# EAGLE board quadcopter (EAGLE 8.1.1)
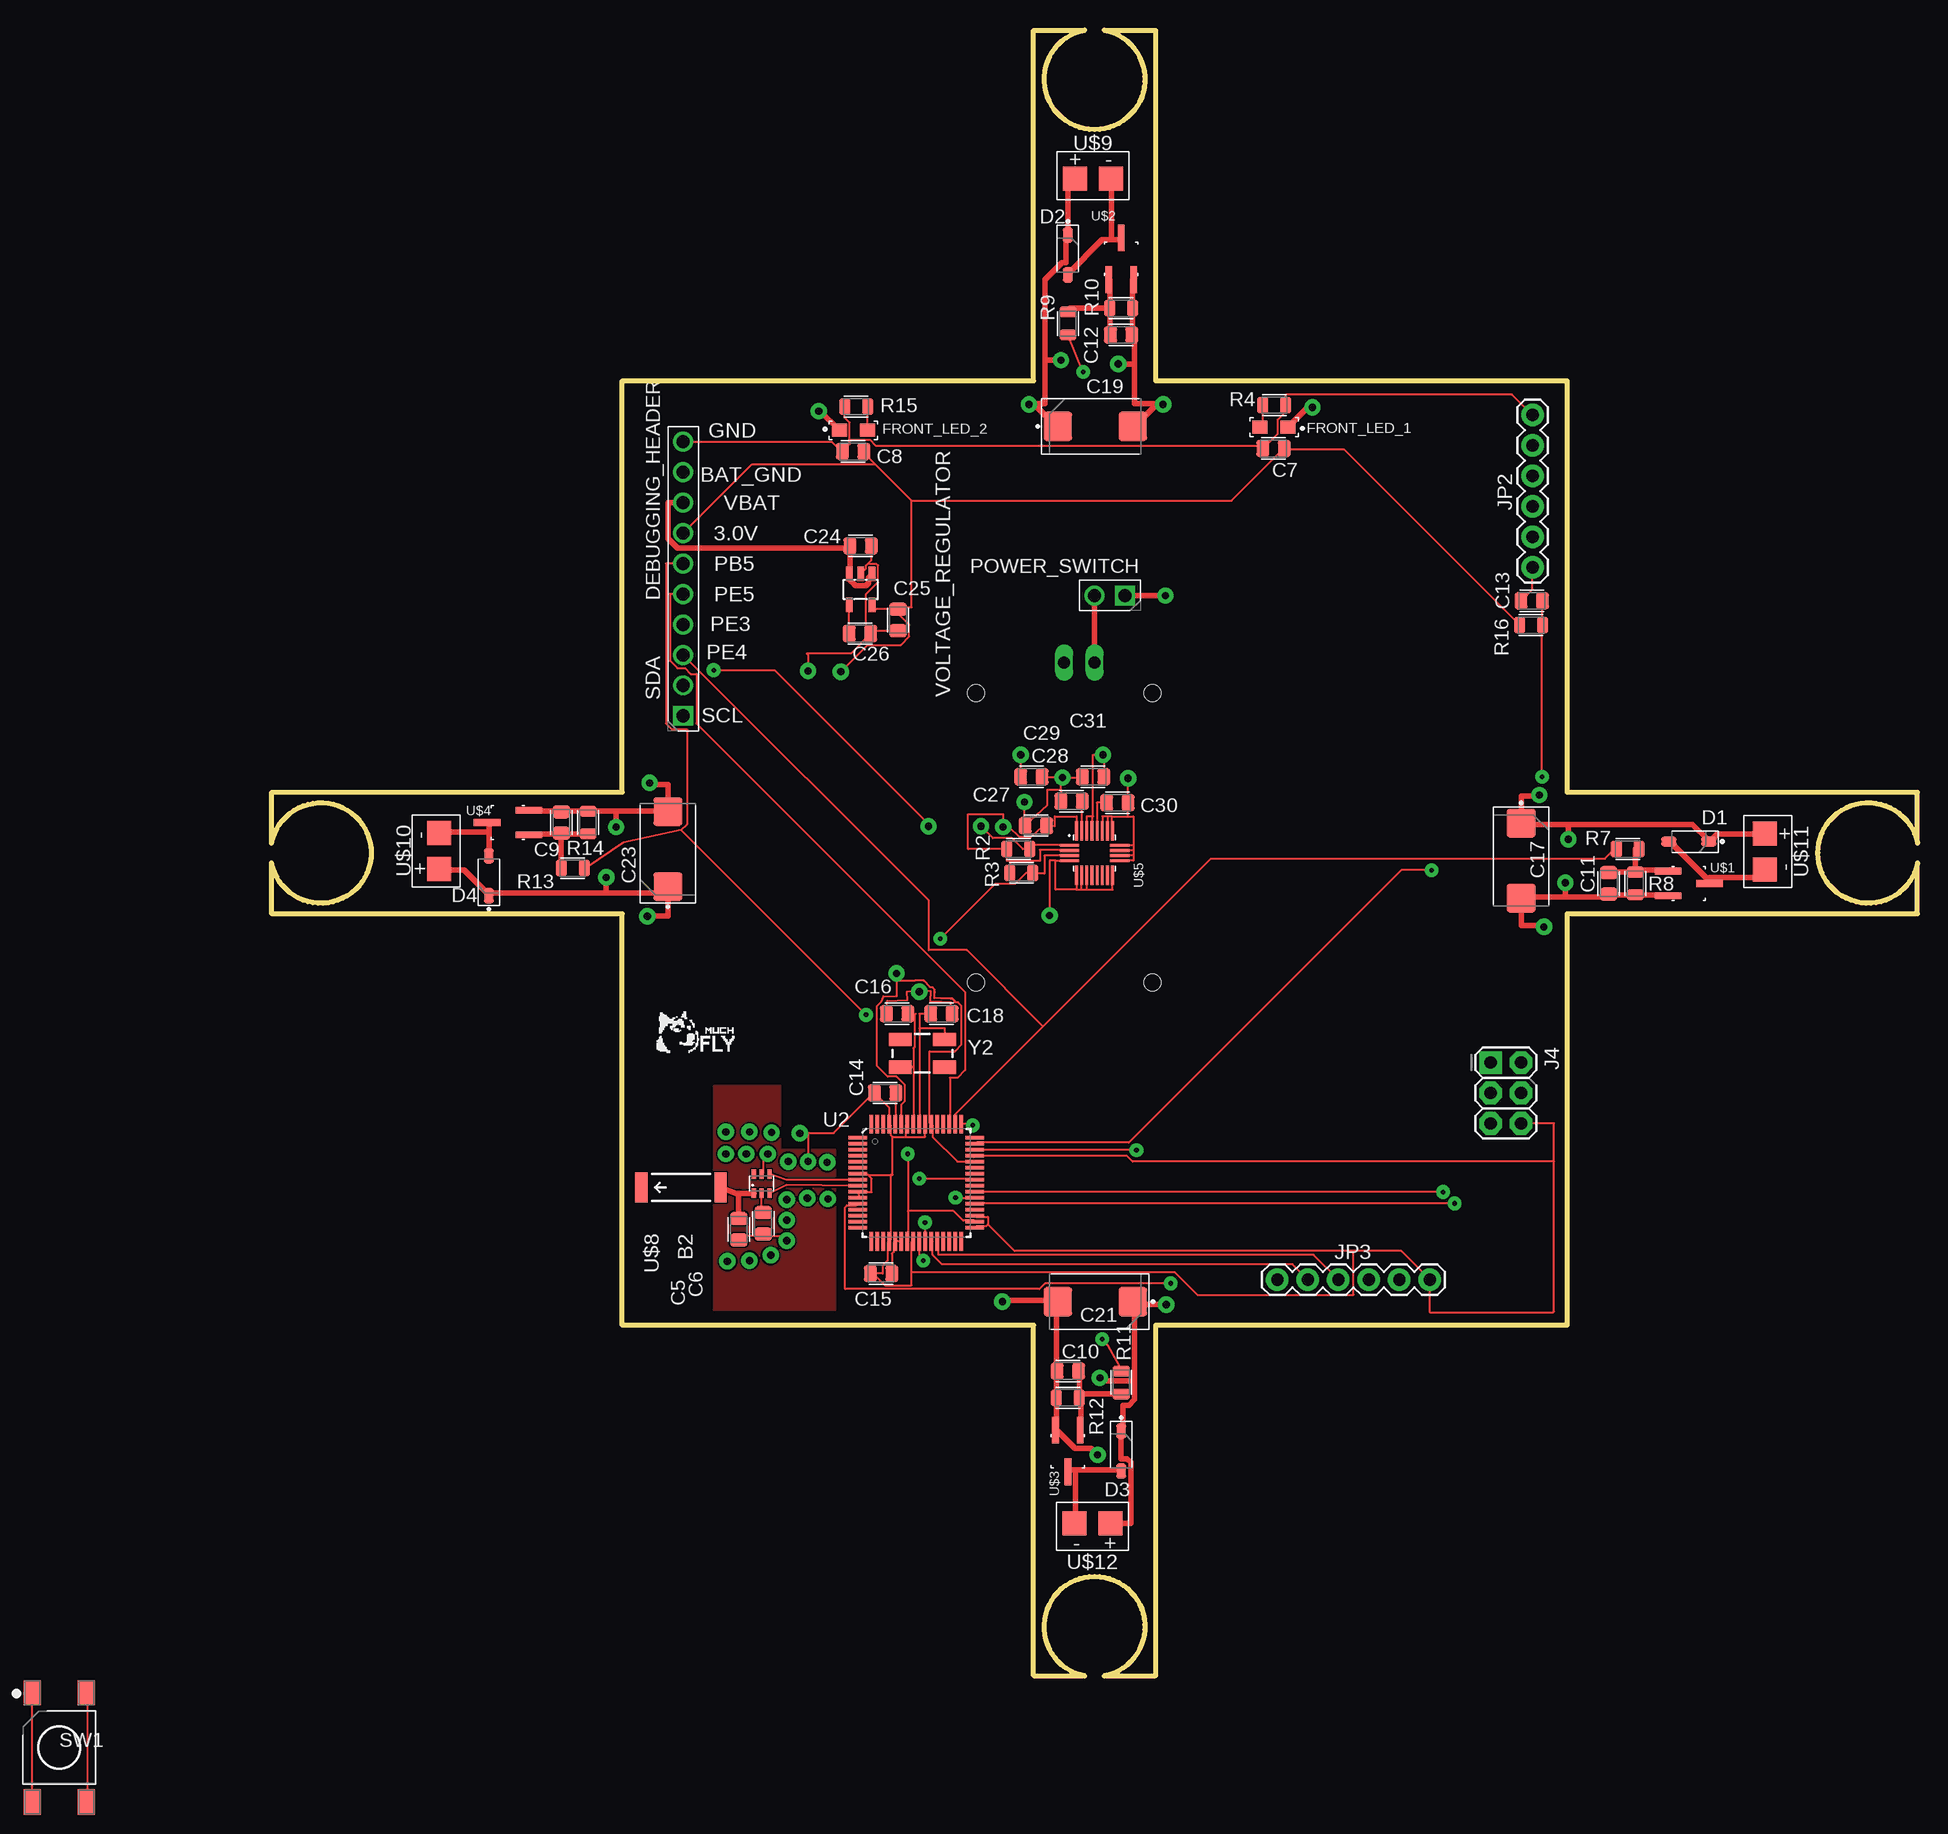
[diagram p0: board, top side]
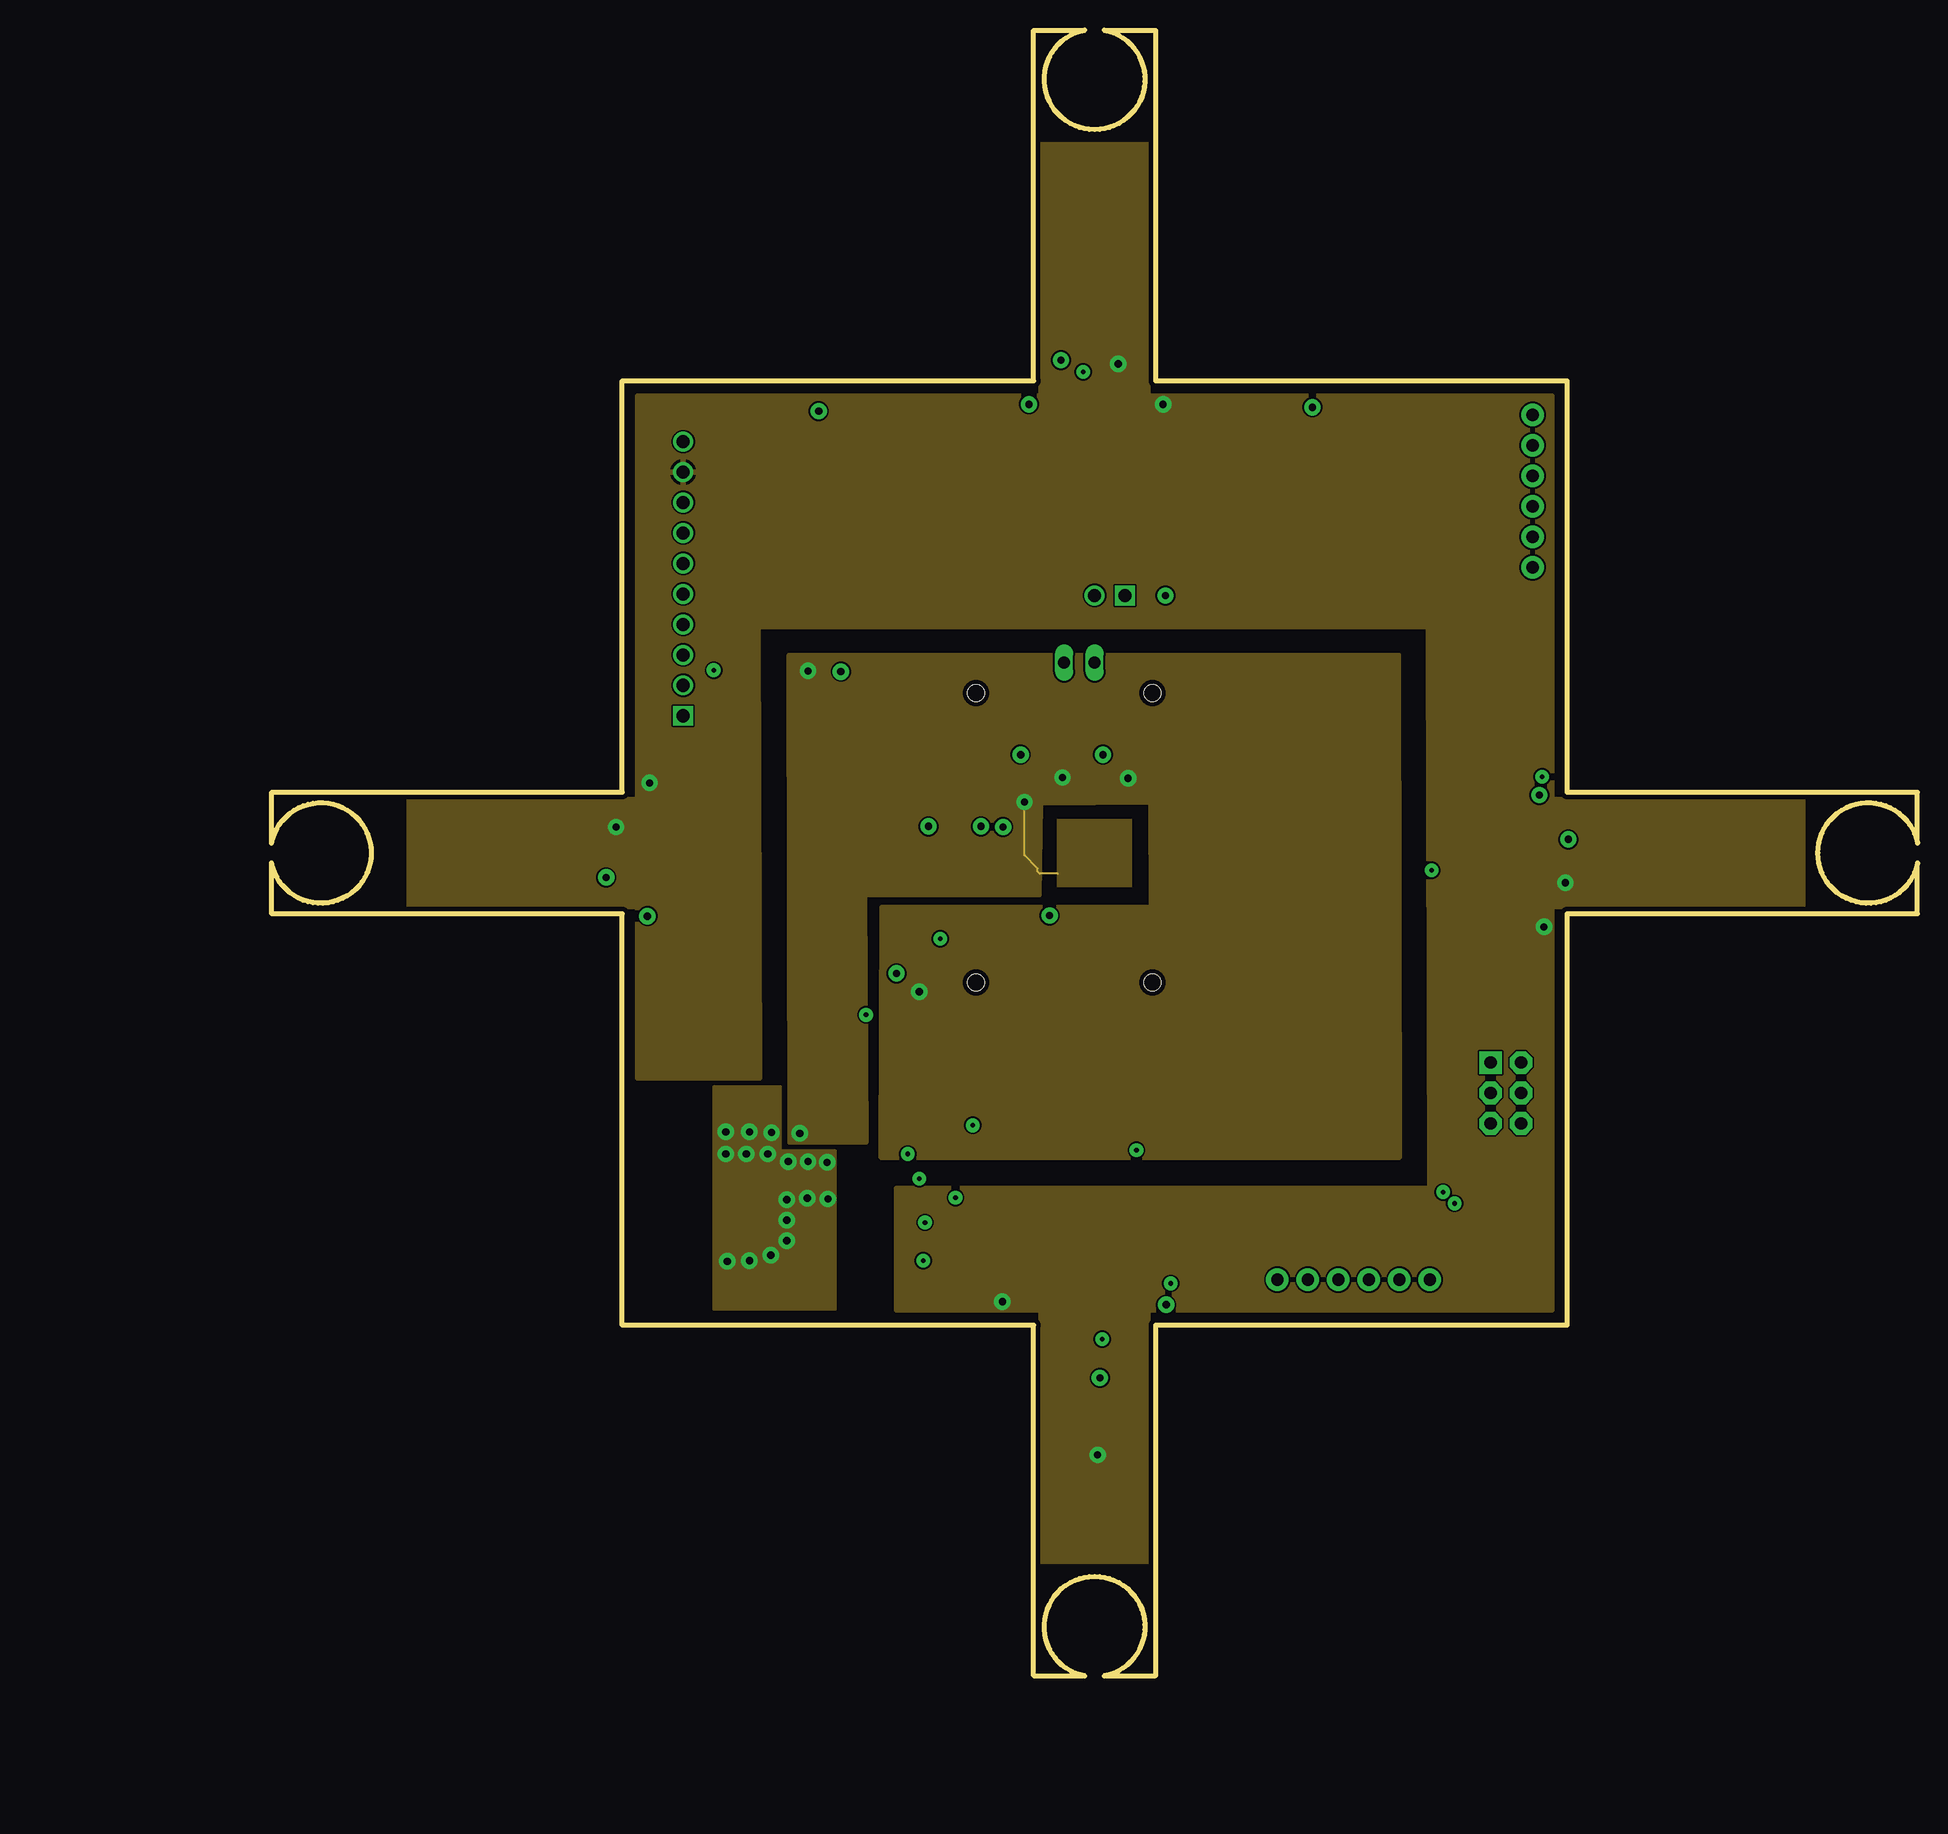
[diagram p1: board, inner layer Route2]
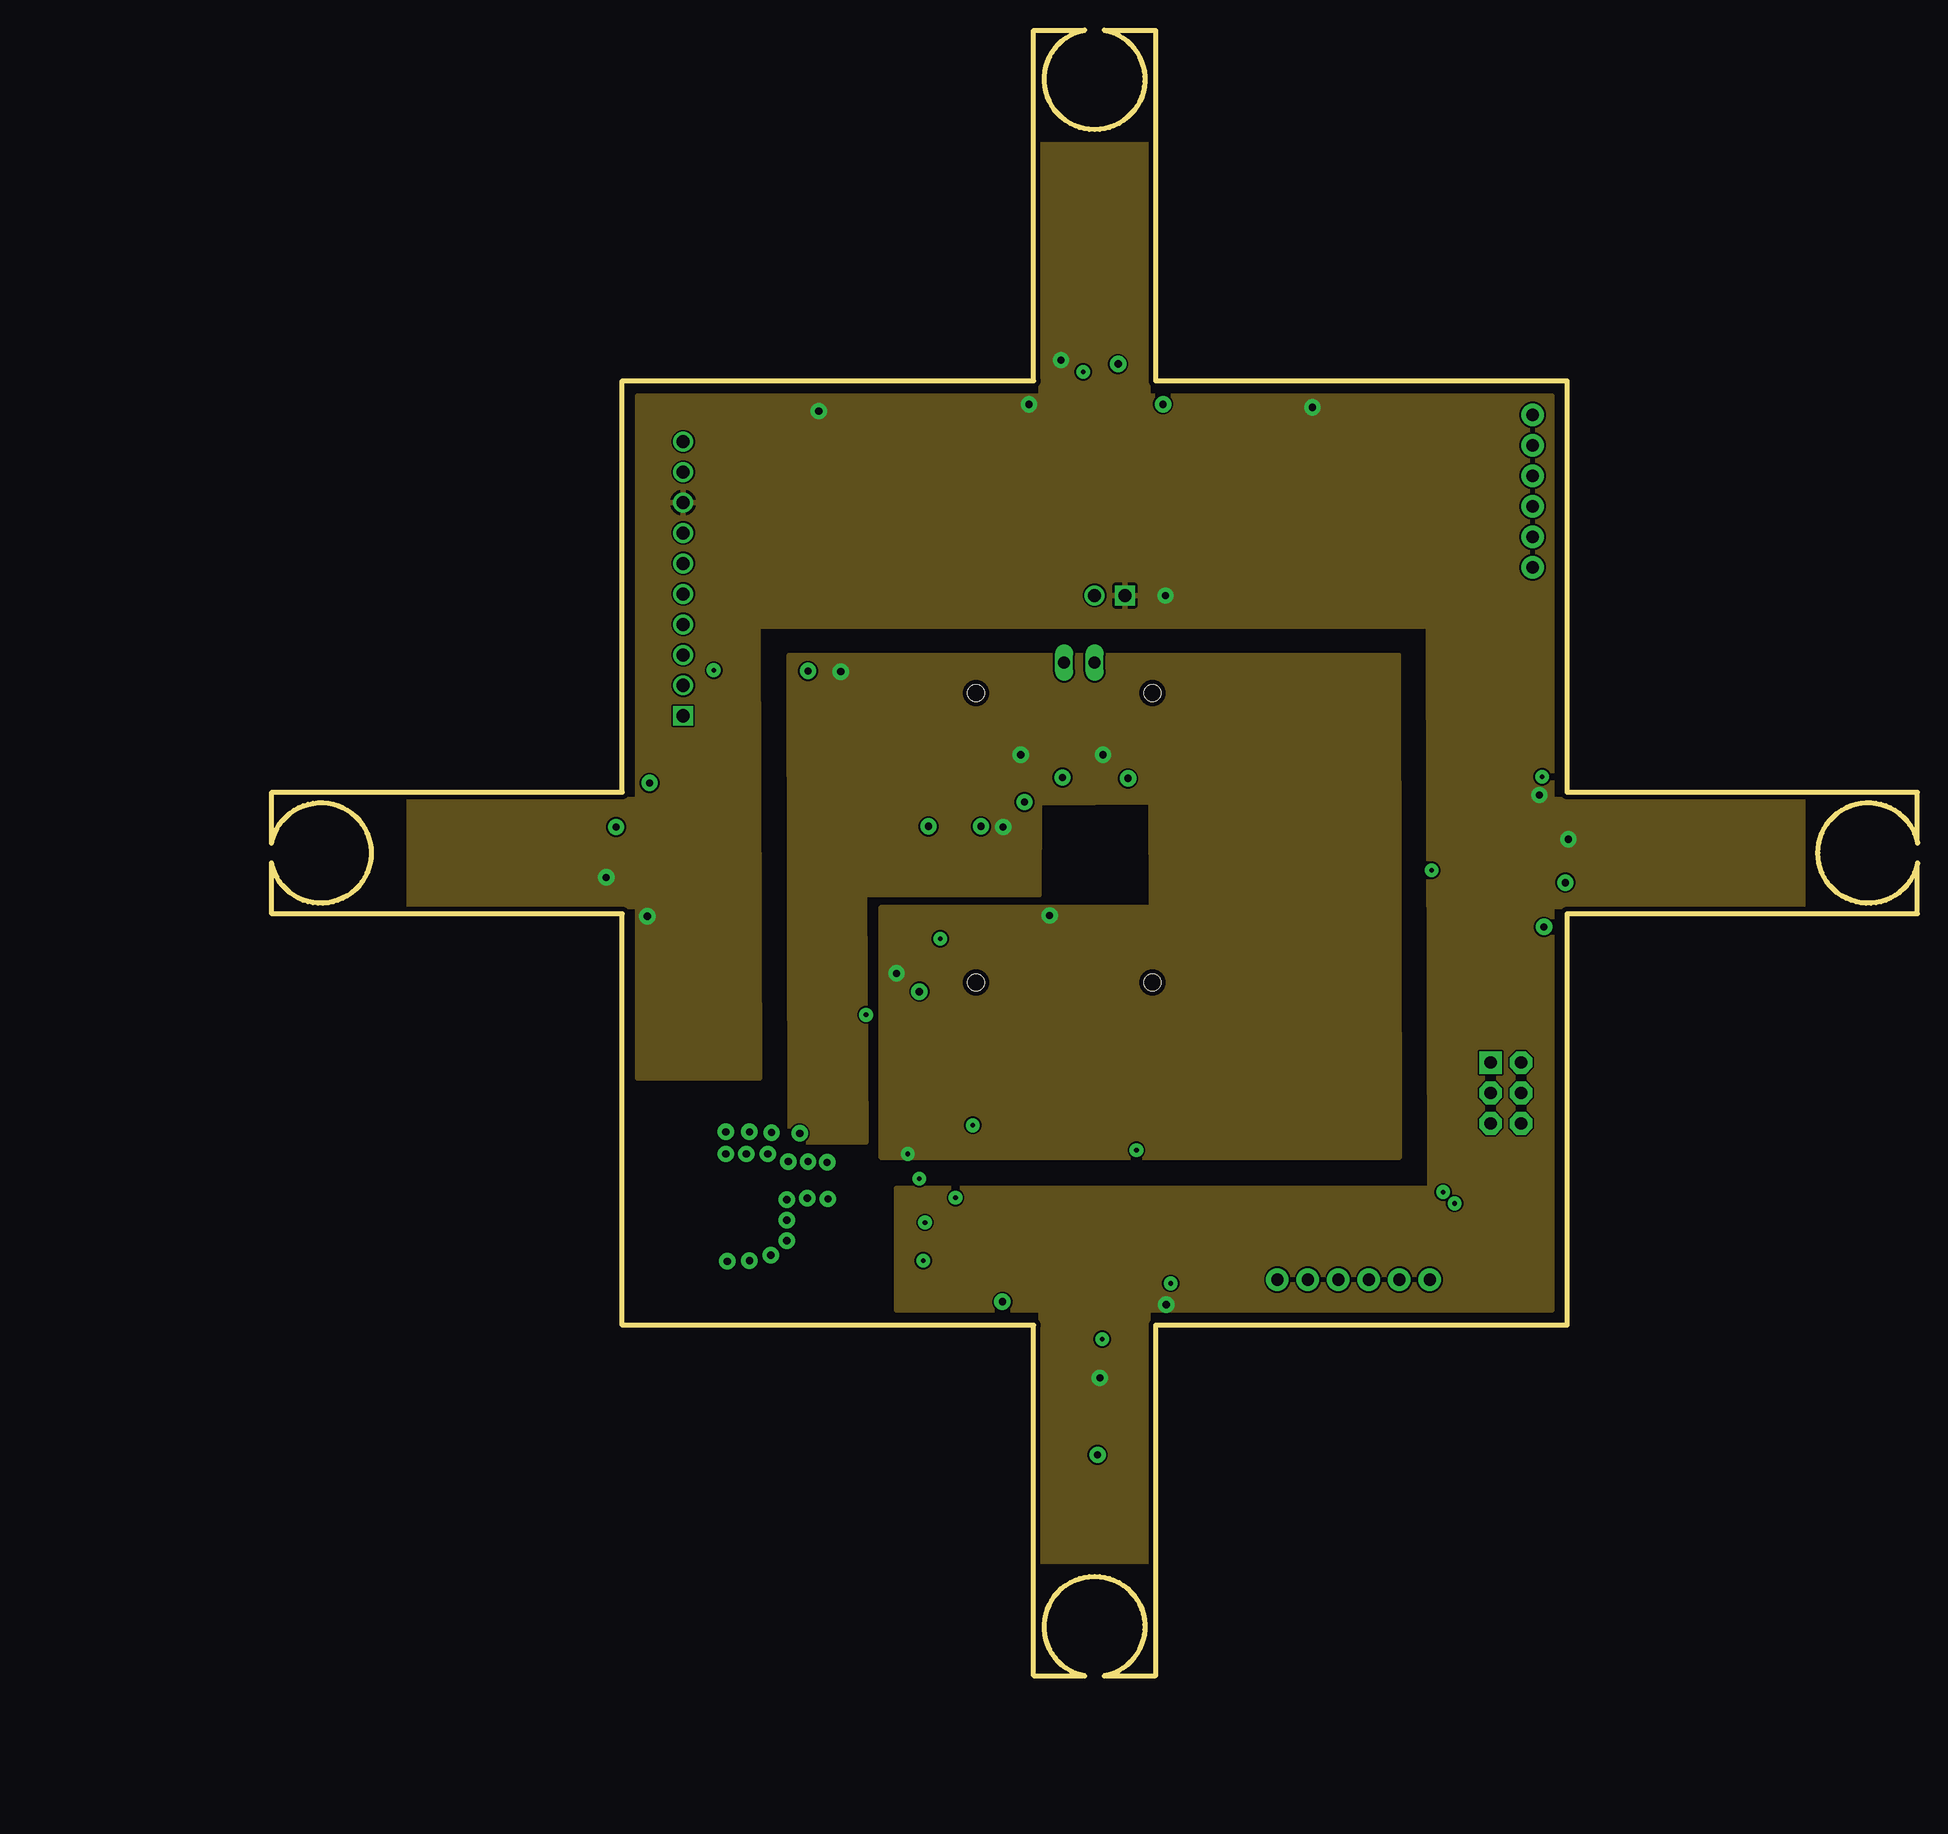
[diagram p2: board, inner layer Route15]
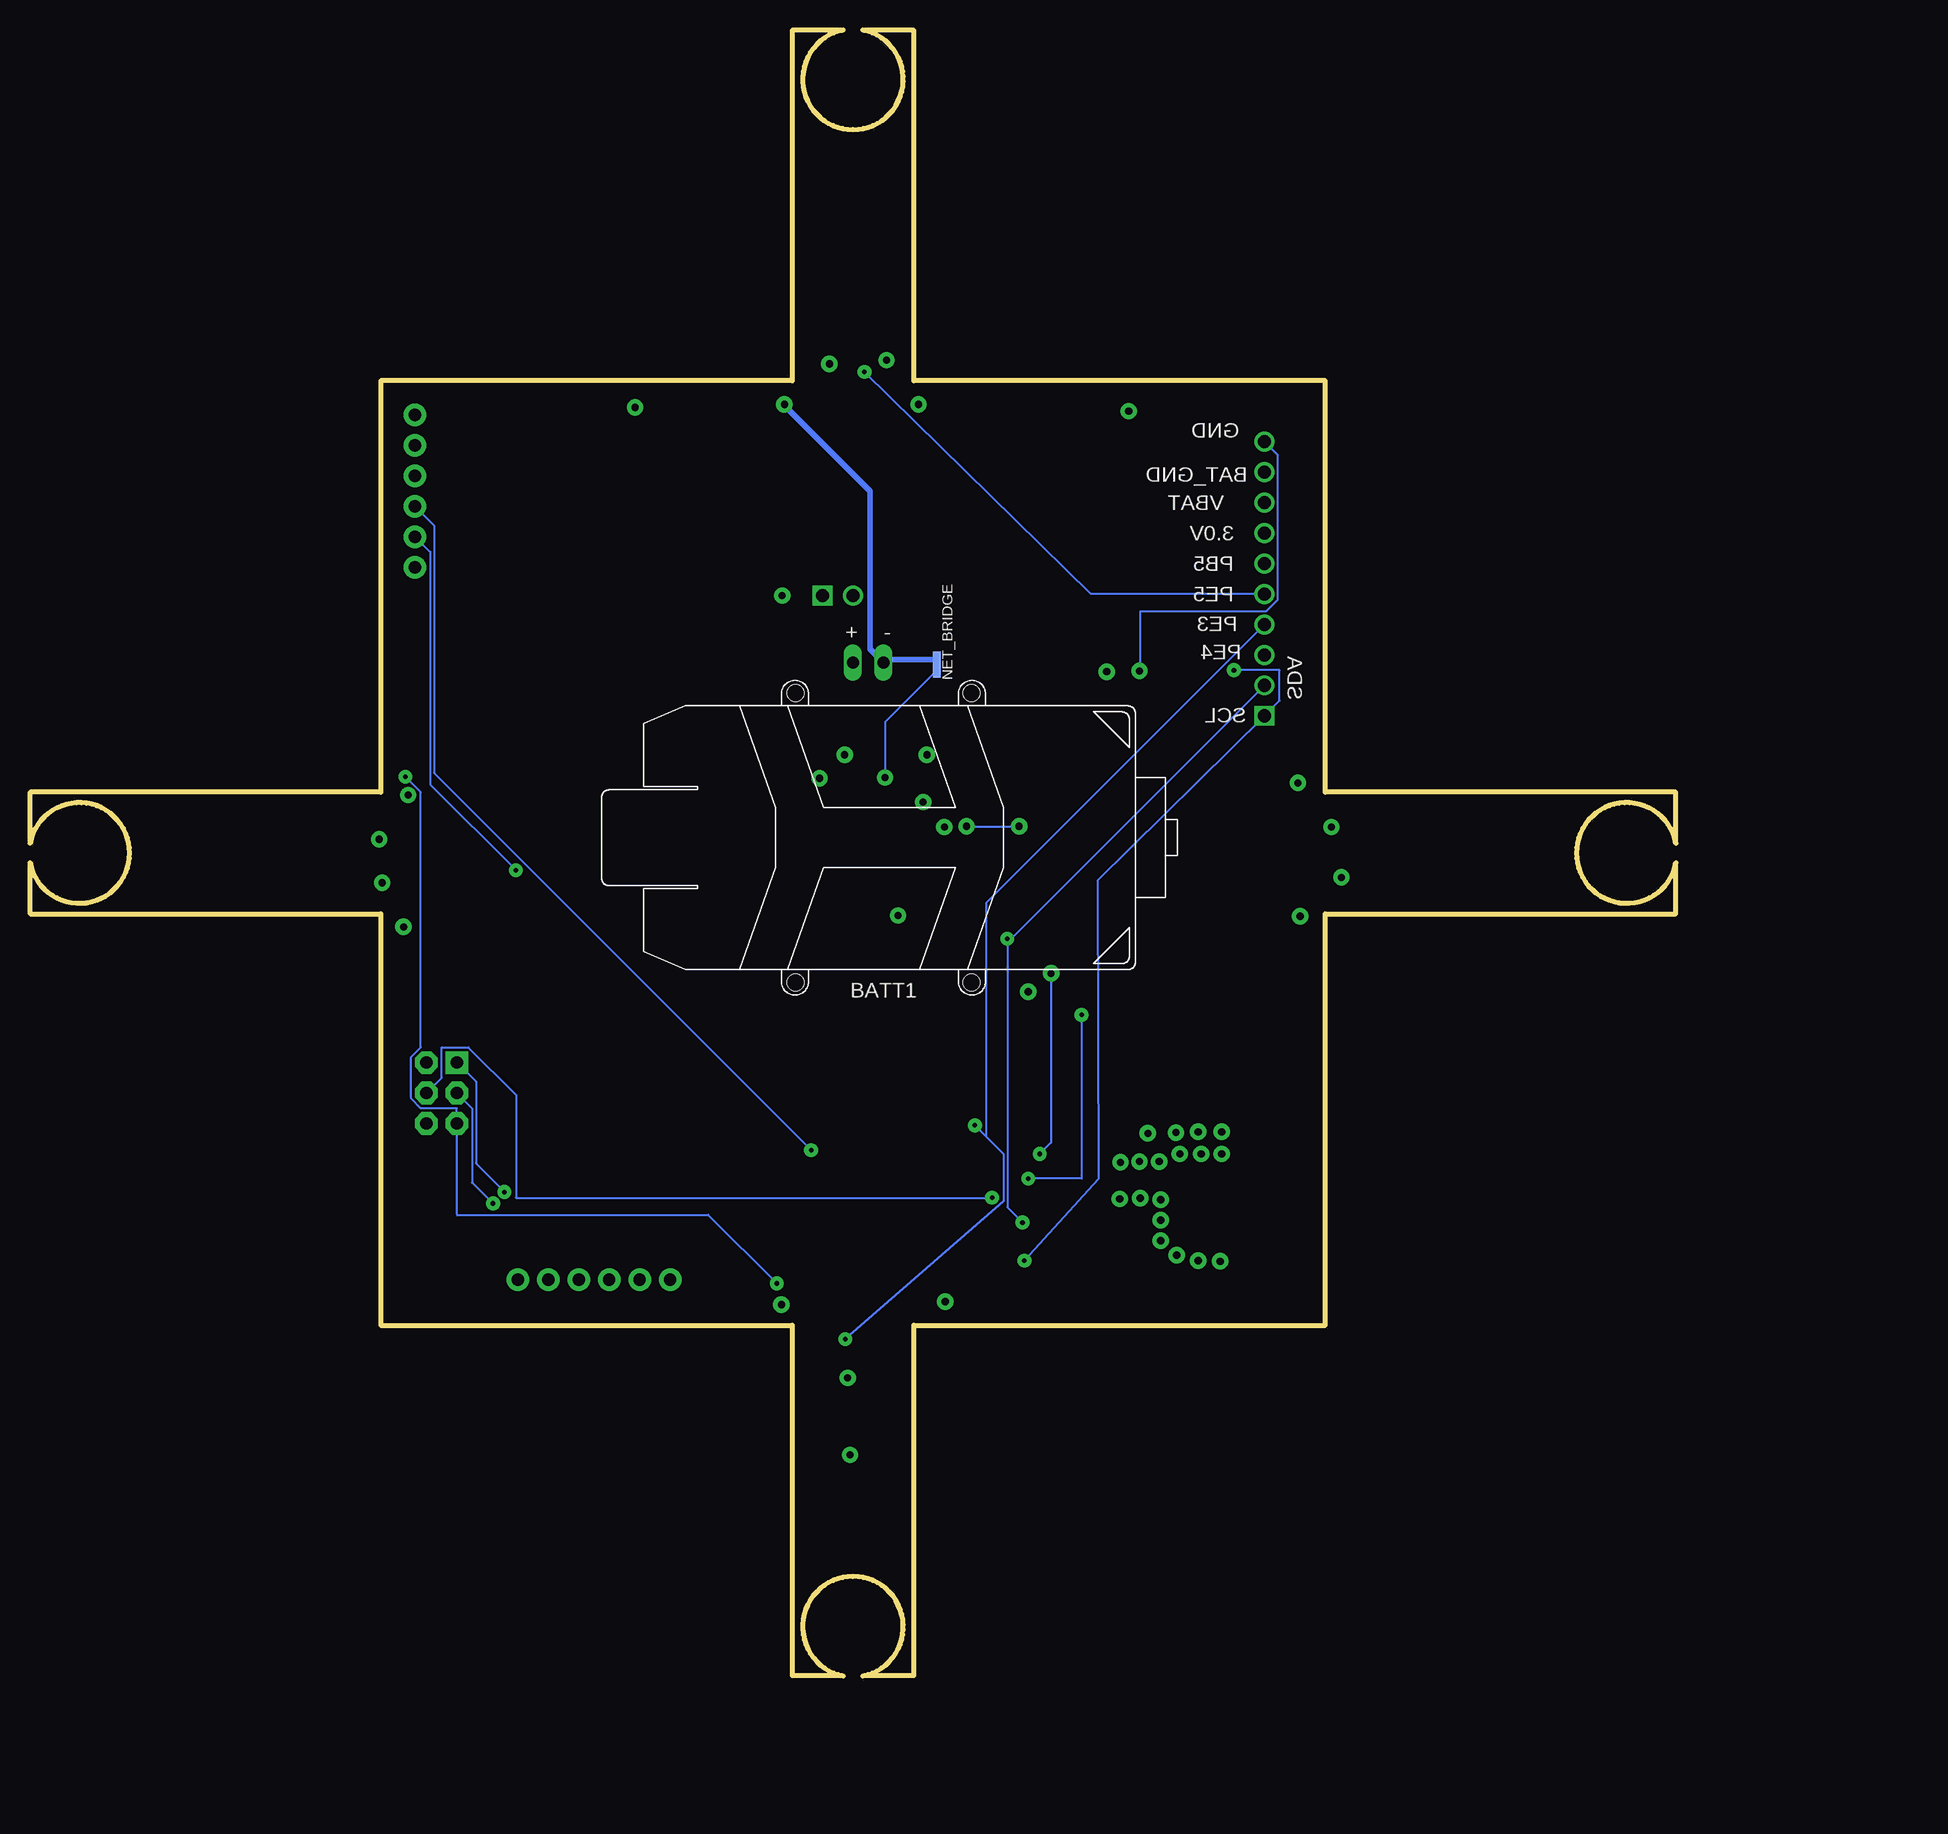
[diagram p3: board, bottom side, seen from below]

Size 137.21 x 137.21 mm. Coordinates in mm from the lower left corner, seen from the top.
Outline: 137.21,67.8 arc-338 137.21,69.4
Outline: 137.18,67.65 137.18,63.52 107.97,63.52 107.97,29.23 73.68,29.23 73.68,0.02 69.56,0.02
Outline: 137.18,69.56 137.18,73.68 107.97,73.68 107.97,107.97 73.68,107.97 73.68,137.18 69.56,137.18
Outline: 69.4,137.21 arc-338 67.8,137.21
Outline: 67.65,137.18 63.52,137.18 63.52,107.97 29.23,107.97 29.23,73.68 0.02,73.68 0.02,69.56
Outline: 0,69.4 arc-338 0,67.8
Outline: 0.02,67.65 0.02,63.52 29.23,63.52 29.23,29.23 63.52,29.23 63.52,0.02 67.65,0.02
Outline: 67.8,0 arc-338 69.4,0
Copper layers (1*2*15*16): Top 0.035559375mm / dielectric 1.501140625mm / Route2 0.035559375mm / dielectric 0.149859375mm / Route15 0.035559375mm / dielectric 0.200659375mm / Bottom 0.035559375mm
Design rules "4pcb-66board": minimum track width 6mil, minimum drill 15mil, track to track 6mil, track to pad 6mil, pad to pad 6mil, via to via 6mil, smd to smd 6mil, copper to edge 15mil, drill to drill 10mil, minimum pad ring 10mil, minimum via ring 15mil, stop-mask expansion 4mil, vias tented up to drill 0mil, thermal gap 10mil
Net classes: 1 RFSIG: width 0.457 mm; 2 HIGHCURRENT: width 0.457 mm
tRestrict: area 29.7,29.9 to 36.5,49.3; 8 lines
bRestrict: area 65.6,65.8 to 71.7,71.4; area 29.7,30.2 to 36.4,49.3; 1 lines

## Footprints (pad centres in the part's own frame; a part is rotated, then mirrored left to right if it is on the bottom)
BALUN = smd 0.35 x 0.8: 1 -0.65,-0.8; 2 0,-0.8; 3 0.65,-0.8; 4 0.65,0.8; 5 0,0.8; 6 -0.65,0.8
BATTERY-W/HOLDER-380MAH-HUBSAN = drill 1 long: + -2.54,14.605; - 0,14.605 | hole 1.4: -7.35,-12.05; -7.35,12.05; 7.35,-12.05; 7.35,12.05
CAPC2012X140_HS = smd 1.08 x 1.42: 1 -0.895,0; 2 0.895,0
CAPMP7343X310_HS = smd 2.37 x 2.43: 1 -3.12,0; 2 3.12,0
SOD3716X135_HS = smd 1.25 x 0.8: A 1.665,0; C -1.665,0
HDRV10W63P254_10X1_2540X254H838_HS = drill 1.1 pad 1.65 square: 1 0,0 | drill 1.1 pad 1.65: 2 2.54,0; 3 5.08,0; 4 7.62,0; 5 10.16,0; 6 12.7,0; 7 15.24,0; 8 17.78,0; 9 20.32,0; 10 22.86,0
KINGBRIGHT_LED = smd 1.25 x 1.1: P$1 0,0; P$2 2.35,0
2X3-NS = drill 1.016 pad 1.88 square: 1 -2.54,-1.27 | drill 1.016 pad 1.88 octagon: 2 -2.54,1.27; 3 0,-1.27; 4 0,1.27; 5 2.54,-1.27; 6 2.54,1.27
FTDI_BASIC = drill 1.016 pad 1.88: CTS 10.16,0; DTR 0,0; GND 12.7,0; RXI 2.54,0; TXO 5.08,0; VCC 7.62,0
NET_BRIDGE = smd 1.27 x 0.635: P$1 0,0; P$2 0.9,0
MALE_HEADER_2X1_0.1IN = drill 1.1 pad 1.65 square: 1 0,0 | drill 1.1 pad 1.65: 2 2.54,0
RESC2012X60_HS = smd 0.92 x 1.38: 1 -0.955,0; 2 0.955,0
TE_FSM8JSMA_HS = smd 1.4 x 2.1: 1 -2.25,4.55; 2 -2.25,-4.55; 3 2.25,4.55; 4 2.25,-4.55
QFN-64 = smd 1.562 x 0.28: 1 -4.881,3.75; 2 -4.881,3.25; 3 -4.881,2.75; 4 -4.881,2.25; 5 -4.881,1.75; 6 -4.881,1.25; 7 -4.881,0.75; 8 -4.881,0.25; 9 -4.881,-0.25; 10 -4.881,-0.75; 11 -4.881,-1.25; 12 -4.881,-1.75; 13 -4.881,-2.25; 14 -4.881,-2.75; 15 -4.881,-3.25; 16 -4.881,-3.75; 33 4.881,-3.75; 34 4.881,-3.25; 35 4.881,-2.75; 36 4.881,-2.25; 37 4.881,-1.75; 38 4.881,-1.25; 39 4.881,-0.75; 40 4.881,-0.25; 41 4.881,0.25; 42 4.881,0.75; 43 4.881,1.25; 44 4.881,1.75; 45 4.881,2.25; 46 4.881,2.75; 47 4.881,3.25; 48 4.881,3.75 | smd 0.28 x 1.562: 17 -3.75,-4.881; 18 -3.25,-4.881; 19 -2.75,-4.881; 20 -2.25,-4.881; 21 -1.75,-4.881; 22 -1.25,-4.881; 23 -0.75,-4.881; 24 -0.25,-4.881; 25 0.25,-4.881; 26 0.75,-4.881; 27 1.25,-4.881; 28 1.75,-4.881; 29 2.25,-4.881; 30 2.75,-4.881; 31 3.25,-4.881; 32 3.75,-4.881; 49 3.75,4.881; 50 3.25,4.881; 51 2.75,4.881; 52 2.25,4.881; 53 1.75,4.881; 54 1.25,4.881; 55 0.75,4.881; 56 0.25,4.881; 57 -0.25,4.881; 58 -0.75,4.881; 59 -1.25,4.881; 60 -1.75,4.881; 61 -2.25,4.881; 62 -2.75,4.881; 63 -3.25,4.881; 64 -3.75,4.881
MOFSET_SI2302CDS-T1-E3CT-ND = smd 0.559 x 2.224: P$1 -1.032,-1.734; P$2 1.032,-1.734; P$3 0,1.734
IMU_497-14946-1-ND = smd 0.23 x 1.6: P$1 -1.505,1.85; P$6 -1.505,-1.85; P$7 -1.075,-1.85; P$8 -0.645,-1.85; P$9 -0.215,-1.85; P$10 0.215,-1.85; P$11 0.645,-1.85; P$12 1.075,-1.85; P$13 1.505,-1.85; P$18 1.505,1.85; P$19 1.075,1.85; P$20 0.645,1.85; P$21 0.215,1.85; P$22 -0.215,1.85; P$23 -0.645,1.85; P$24 -1.075,1.85 | smd 1.6 x 0.23: P$2 -2.1,0.645; P$3 -2.1,0.215; P$4 -2.1,-0.215; P$5 -2.1,-0.645; P$14 2.1,-0.645; P$15 2.1,-0.215; P$16 2.1,0.215; P$17 2.1,0.645
ANTENNA-CHIP5 = smd 1.016 x 2.54: FEED -3.302,0; NC 3.302,0
MOTOR_PADS = smd 2 x 2: V+ -1,0; V- 2,0
SOT23-DBV = smd 0.55 x 1.2: 1 -0.95,-1.3; 2 0,-1.3; 3 0.95,-1.3; 4 0.95,1.3; 5 -0.95,1.3
CRYSTAL-SMD-5X3 = smd 1.9 x 1.1: 1 -1.85,-1.15; 2 1.85,-1.15; 3 1.85,1.15; 4 -1.85,1.15

## Placement (x,y rotation side)
B2  BALUN0805  [BALUN]  40.85,41.04 0 top
BATT1  BATTERY-HUBSAN-W/HOLDER  [BATTERY-W/HOLDER-380MAH-HUBSAN]  66.06,69.87 0 bottom
C5  0.75pF  [CAPC2012X140_HS]  38.95,37.23 270 top
C6  22pF  [CAPC2012X140_HS]  40.98,37.74 90 top
C7  1uF  [CAPC2012X140_HS]  83.53,102.32 180 top
C8  1uF  [CAPC2012X140_HS]  48.47,102.07 180 top
C9  0.1uF  [CAPC2012X140_HS]  24.15,71.14 90 top
C10  0.1uF  [CAPC2012X140_HS]  66.38,25.42 180 top
C11  0.1uF  [CAPC2012X140_HS]  111.47,66.06 270 top
C12  0.1uF  [CAPC2012X140_HS]  70.83,111.78 0 top
C13  0.1uF  [CAPC2012X140_HS]  105.05,89.62 0 top
C14  12pF  [CAPC2012X140_HS]  51.14,48.6 180 top
C15  12pF  [CAPC2012X140_HS]  50.82,33.55 180 top
C16  12pF  [CAPC2012X140_HS]  52.16,55.2 180 top
C17  220uF  [CAPMP7343X310_HS]  104.16,67.97 270 top
C18  12pF  [CAPC2012X140_HS]  55.84,55.2 0 top
C19  220uF  [CAPMP7343X310_HS]  68.67,104.16 0 top
C21  220uF  [CAPMP7343X310_HS]  68.67,31.2 180 top
C23  220uF  [CAPMP7343X310_HS]  33.04,68.92 90 top
C24  1uF  [CAPC2012X140_HS]  49.11,94.19 180 top
C25  1uF  [CAPC2012X140_HS]  52.22,88.03 270 top
C26  0.01uF  [CAPC2012X140_HS]  49.04,86.89 0 top
C27  0.1uF  [CAPC2012X140_HS]  63.71,70.89 180 top
C28  0.1uF  [CAPC2012X140_HS]  63.33,74.95 0 top
C29  0.1uF  [CAPC2012X140_HS]  66.7,72.92 180 top
C30  0.01uF  [CAPC2012X140_HS]  70.51,72.79 0 top
C31  10uF  [CAPC2012X140_HS]  68.48,74.95 180 top
D1  360mV  [SOD3716X135_HS]  118.13,69.56 180 top
D2  360mV  [SOD3716X135_HS]  66.38,118.45 270 top
D3  360mV  [SOD3716X135_HS]  70.83,18.76 270 top
D4  360mV  [SOD3716X135_HS]  18.12,66.7 90 top
DEBUGGING_HEADER  [HDRV10W63P254_10X1_2540X254H838_HS]  34.31,80.03 90 top
FRONT_LED_1  GREEN  [KINGBRIGHT_LED]  84.73,104.1 180 top
FRONT_LED_2  GREEN  [KINGBRIGHT_LED]  47.33,103.84 0 top
J4  AVR_SPI_PRG_6NS  [2X3-NS]  102.89,48.6 270 top
JP2  FTDI_BASICPTH  [FTDI_BASIC]  105.12,92.42 90 top
JP3  FTDI_BASICPTH  [FTDI_BASIC]  83.84,33.04 0 top
NET_BRIDGE  NET_BRIDGE  [NET_BRIDGE]  61.62,83.84 90 bottom
POWER_SWITCH  [MALE_HEADER_2X1_0.1IN]  71.14,90.07 180 top
R2  10K  [RESC2012X60_HS]  62.25,68.92 180 top
R3  10K  [RESC2012X60_HS]  62.51,66.95 0 top
R4  20  [RESC2012X60_HS]  83.59,105.94 0 top
R7  100  [RESC2012X60_HS]  113.05,68.92 0 top
R8  10K  [RESC2012X60_HS]  113.69,66.06 90 top
R9  100  [RESC2012X60_HS]  66.38,112.74 90 top
R10  10K  [RESC2012X60_HS]  70.83,114.01 180 top
R11  100  [RESC2012X60_HS]  70.83,24.47 270 top
R12  10K  [RESC2012X60_HS]  66.38,23.2 0 top
R13  100  [RESC2012X60_HS]  25.11,67.33 180 top
R14  10K  [RESC2012X60_HS]  26.38,71.14 270 top
R15  20  [RESC2012X60_HS]  48.73,105.81 180 top
R16  10K  [RESC2012X60_HS]  104.99,87.59 180 top
SW1  PUSHBUTTON_SMD-VERTICAL-1  [TE_FSM8JSMA_HS]  -17.69,-5.95 0 top  (outside the outline)
U2  ATMEGA128RFA1  [QFN-64]  53.74,41.11 0 top
U$1  [MOFSET_SI2302CDS-T1-E3CT-ND]  118.13,66.06 270 top
U$2  [MOFSET_SI2302CDS-T1-E3CT-ND]  70.83,118.13 0 top
U$3  [MOFSET_SI2302CDS-T1-E3CT-ND]  66.38,18.76 180 top
U$4  [MOFSET_SI2302CDS-T1-E3CT-ND]  19.71,71.14 90 top
U$5  IMU_497-14946-1-ND  [IMU_497-14946-1-ND]  68.6,68.6 0 top
U$7  [DOGE]  32.15,51.58 0 top
U$8  ANTENNA2SMD5  [ANTENNA-CHIP5]  34.12,40.73 180 top
U$9  MOTOR_PADS  [MOTOR_PADS]  67.97,124.8 0 top
U$10  MOTOR_PADS  [MOTOR_PADS]  13.99,68.29 90 top
U$11  MOTOR_PADS  [MOTOR_PADS]  124.48,69.24 270 top
U$12  MOTOR_PADS  [MOTOR_PADS]  68.92,12.72 180 top
VOLTAGE_REGULATOR  TPS73633-DBVT  [SOT23-DBV]  49.11,90.57 180 top
Y2  [CRYSTAL-SMD-5X3]  54.25,51.9 0 top

## Library data of the parts
B2 = quadparts_prebuilt; DATASHEET: http://katalog.we-online.de/pbs/datasheet/748421245.pdf; DIST: Digikey; DISTPN: 732-2230-6-ND; MFR: Wurth Electronics Inc; MPN: 748421245; PRICE: 2.63
BATT1 = quadparts_prebuilt; CREATOR: Swanson; DIST: AMAZON; DISTPN: http://www.amazon.com/dp/B00RROB6Q4?smid=AMNTPWSAB5H0S; MFR: HUBSAN; MPN: X4-H107C-8-in-1
C5 = quadparts_prebuilt; DIST: Digikey; DISTPN: 490-3585-1-ND; MFR: Murata Electronics North America; MPN: GQM2195C2AR75CB01D
C6 = quadparts_prebuilt; DIST: Digikey; DISTPN: 490-5534-1-ND; MFR: Murata Electronics North America; MPN: GRM21A5C2E220JW01D
C7 C8 C24 C25 = quadparts_prebuilt; DIST: Digikey; DISTPN: 490-4736-1-ND; MFR: Murata Electronics North America; MPN: GRM21BR71H105KA12L
C9-C13 C27-C29 = quadparts_prebuilt; DIST: Digikey; DISTPN: 490-1666-1-ND; MFR: Murata Electronics North America; MPN: GRM21BR71H104KA01L
C14-C16 C18 = quadparts_prebuilt; DIST: Digikey; DISTPN: 490-5531-1-ND; MFR: Murata Electronics North America; MPN: GRM21A5C2E120JW01D
C17 C19 C21 C23 = quadparts_prebuilt; DIST: Digikey; DISTPN: 478-8912-1-ND; MFR: AVX Corporation; MPN: TAJD227K006RNJ
C26 C30 = quadparts_prebuilt; DIST: Digikey; DISTPN: 490-8295-1-ND; MFR: Murata Electronics North America; MPN: GRM2195C1H103FA01D
C31 = quadparts_prebuilt; DIST: Digikey; DISTPN: 490-5523-1-ND; MFR: Murata Electronics North America; MPN: GRM21BR61E106KA73L
D1-D4 = quadparts_prebuilt; DIST: Digikey; DISTPN: CRS08QMCT-ND; MFR: Toshiba Semiconductor and Storage; MPN: CRS08(TE85L,Q,M)
DEBUGGING_HEADER = quadparts_prebuilt; DIST: Digikey; DISTPN: 609-3250-ND; MFR: Amphenol FCI; MPN: 68000-110HLF
FRONT_LED_1 FRONT_LED_2 = LEDs; CREATOR: Chris Miranda; DIST: Digikey; DISTPN: 754-1795-1-ND; MFR: Kingbright; MPN: APT2012ZGCK; REVIEWER: Group3
J4 = quadparts_prebuilt; DATASHEET: http://portal.fciconnect.com/Comergent//fci/drawing/67996.pdf; DIST: Digikey; DISTPN: 609-3234-ND; MFR: Amphenol FCI; MPN: 67997-206HLF; PRICE: 0.31
JP2 JP3 = quadparts_prebuilt; DATASHEET: http://portal.fciconnect.com/Comergent//fci/drawing/68015.pdf; DIST: Digikey; DISTPN: 609-3327-ND; MFR: Amphenol FCI; MPN: 68016-406HLF; PRICE: 0.33
NET_BRIDGE = quadparts_jay; CREATOR: Chris Miranda; DIST: none; DISTPN: none; MFR: none; MPN: none; REVIEWER: Group3
POWER_SWITCH = quadparts_jay; CREATOR: SWANSON; DIST: Digikey; DISTPN: 3M9447-ND; MFR: 3M; MPN: 961102-6404-AR; REVIEWER: Group3
R2 R3 R8 R10 R12 R14 R16 = quadparts_prebuilt; DIST: Digikey; DISTPN: 311-10KARCT-ND; MFR: Yageo; MPN: RC0805JR-0710KL
R4 R15 = quadparts_prebuilt; CREATOR: Chris Miranda; DIST: Digikey; DPN: 311-20ARCT-ND; MFR: Yageo; MPN: RC0805JR-0720RL
R7 R9 R11 R13 = quadparts_prebuilt; DIST: Digikey; DISTPN: 311-100ARCT-ND; MFR: Yageo; MPN: RC0805JR-07100RL
SW1 = quadparts_prebuilt; DIST: Digikey; DISTPN: 450-1129-ND; MFR: TE Connectivity Alcoswitch Switches; MPN: FSM4JSMA
U2 = quadparts_prebuilt; CREATOR: Swanson; DATASHEET: http://www.atmel.com/Images/Atmel-8266-MCU_Wireless-ATmega128RFA1_Datasheet.pdf; DIST: Digikey; DISTPN: ATMEGA128RFA1-ZUR00DKR-ND; MFR: Atmel; MPN: ATMEGA128RFA1-ZUR00; PRICE: 10.21
U$1-U$4 = quadparts_jay; CREATOR: Jay Ives; DIST: Digikey; DISTPN: SI2302CDS-T1-E3CT-ND; MFR: Vishay Siliconix; MPN: SI2302CDS-T1-E3; REVIEWER: Group3
U$5 = quadparts_jay; CREATOR: Jay Ives; DIST: Digikey; DISTPN: 497-14946-1-ND; MFR: STMicroelectronics; MPN: LSM9DS1TR; REVIEWER: Group3
U$7 = quadparts_jay
U$8 = quadparts_prebuilt; DATASHEET: http://www.linxtechnologies.com/resources/data-guides/ant-xxx-chp-x.pdf; DIST: Digikey; DISTPN: ANT-2.45-CHPCT-ND; MFR: Linx Technologies Inc.; MPN: ANT-2.45-CHP-T; PRICE: 3.16
U$9-U$12 = quadparts_prebuilt; DIST: NA; DISTPN: NA; MFR: NA; MPN: NA
VOLTAGE_REGULATOR = quadparts_prebuilt; DATASHEET: http://www.ti.com/lit/ds/symlink/lp3985.pdf; DIST: Digikey; DISTPN: LP3985IM5X-3.0/NOPBCT-ND; MFR: Texas Instruments; MPN: LP3985IM5X-3.0/NOPB; PRICE: 0.59
Y2 = quadparts_prebuilt; DATASHEET: http://www.abracon.com/Resonators/abm3b.pdf; DIST: Digikey; DISTPN: 535-9122-1-ND; MFR: Abracon LLC; MPN: ABM3B-16.000MHZ-B2-T; PRICE: 0.68; PROD_ID: XTAL-08218

## Nets
3.0V: C7.1 C8.1 C25.1 C27.1 C28.1 C31.1 DEBUGGING_HEADER.7 R2.2 R3.1 R16.2 U2.23 U2.34 U2.44 U2.54 U2.59 U$5.P$1 U$5.P$3 U$5.P$5 U$5.P$6 U$5.P$7 U$5.P$8 U$5.P$13 U$5.P$22 U$5.P$23 VOLTAGE_REGULATOR.5
A0: U2.63
A1: U2.64
A2: U2.1
A3: U2.2
A4: U2.3
A5: U2.4
A6: U2.5
A7: U2.6
AREF: U2.62
AVDD: C14.1 U2.60
BAT_GND [HIGHCURRENT]: BATT1.- C9.2 C10.2 C11.2 C12.2 C17.2 C19.2 C21.2 C23.2 DEBUGGING_HEADER.9 NET_BRIDGE.P$2 R8.1 R10.1 R12.1 R14.1 U$1.P$2 U$2.P$2 U$3.P$2 U$4.P$2
DTR: C13.1 JP2.DTR
DVDD: C15.1 U2.21 U2.22
FILTERED1 [HIGHCURRENT]: C9.1 R13.2 R14.2 U$4.P$1
FILTERED2 [HIGHCURRENT]: C12.1 R9.2 R10.2 U$2.P$1
FILTERED3 [HIGHCURRENT]: C10.1 R11.2 R12.2 U$3.P$1
FILTERED4 [HIGHCURRENT]: C11.1 R7.2 R8.2 U$1.P$1
FLYBACK1 [HIGHCURRENT]: D4.A U$4.P$3 U$10.V-
FLYBACK2 [HIGHCURRENT]: D2.A U$2.P$3 U$9.V-
FLYBACK3 [HIGHCURRENT]: D3.A U$3.P$3 U$12.V-
FLYBACK4 [HIGHCURRENT]: D1.A U$1.P$3 U$11.V-
GND: B2.5 C5.2 C6.1 C7.2 C8.2 C14.2 C15.2 C16.2 C18.2 C24.1 C25.2 C26.2 C27.2 C28.2 C29.2 C30.2 C31.2 DEBUGGING_HEADER.10 J4.6 JP2.GND JP3.GND NET_BRIDGE.P$1 R4.2 R15.2 U2.7 U2.10 U2.11 U2.20 U2.24 U2.33 U2.35 U2.45 U2.55 U2.58 U2.61 U$5.P$14 U$5.P$15 U$5.P$16 U$5.P$17 U$5.P$18 U$5.P$19 U$5.P$20 VOLTAGE_REGULATOR.2
MISO: J4.1 U2.39
MOSI: J4.4 U2.38
N$1: FRONT_LED_1.P$2 R4.1
N$2: C30.1 U$5.P$21
N$3: SW1.1 SW1.2
N$5: FRONT_LED_2.P$2 R15.1
N$6: SW1.3 SW1.4
N$7: B2.2 C6.2
N$10: C29.1 U$5.P$24
N$12: C16.1 U2.57 Y2.1
N$14: C18.1 U2.56 Y2.3
N$18: C26.1 VOLTAGE_REGULATOR.4
PB4: U2.40
PB5: DEBUGGING_HEADER.6 R13.1 U2.41
PB6: U2.42
PB7: U2.43
PD4: U2.29
PD5: U2.30
PD6: U2.31
PD7: U2.32
PE2: U2.48
PE3: DEBUGGING_HEADER.4 R11.1 U2.49
PE4: DEBUGGING_HEADER.3 R7.1 U2.50
PE5: DEBUGGING_HEADER.5 R9.1 U2.51
PE6: U2.52
PE7: U2.53
PG0: U2.14
PG1: U2.15
PG2: U2.16
PG5: U2.19
RESET: C13.2 J4.5 R16.1 U2.12
RFANT [RFSIG]: B2.1 C5.1 U$8.FEED
RFN: B2.3 U2.9
RFP: B2.4 U2.8
RSTON: U2.13
RX0: JP2.TXO U2.46
RX1: JP3.RXI U2.27
SCK: J4.3 U2.37
SCL: DEBUGGING_HEADER.1 R2.1 U2.25 U$5.P$2
SDA: DEBUGGING_HEADER.2 R3.2 U2.26 U$5.P$4
SSN: U2.36
TX0: JP2.RXI U2.47
TX1: JP3.TXO U2.28
V: BATT1.+ POWER_SWITCH.2
VBAT [HIGHCURRENT]: C17.1 C19.1 C21.1 C23.1 C24.2 D1.C D2.C D3.C D4.C DEBUGGING_HEADER.8 FRONT_LED_1.P$1 FRONT_LED_2.P$1 POWER_SWITCH.1 U$9.V+ U$10.V+ U$11.V+ U$12.V+ VOLTAGE_REGULATOR.1 VOLTAGE_REGULATOR.3

## Tracks (layer width: path | path; a pad name or v marks a point on that pad's centre or on a via)
3.0V  (via drill 0.38, 0.6)
  Top 0.152: U$5.P$6 67.08,66.75 67.08,65.55 | 67.08,65.55 67.53,65.55 | 67.53,65.55 67.96,65.55 | 67.96,65.55 U$5.P$8 | 67.53,65.55 U$5.P$7 | 67.08,65.55 65.36,65.55 65.36,67.97 | 65.36,67.97 66.5,67.97 U$5.P$5 | U$5.P$3 66.5,68.86 64.04,68.86 64.07,67.94 61.55,67.94 | 67.96,65.55 70.11,65.55 | 70.13,65.55 70.11,65.55 | 70.11,65.55 U$5.P$13 | U$5.P$22 68.41,70.45 68.41,71.65 | U$5.P$23 67.96,71.65 68.41,71.65 | U$5.P$1 67.1,71.65 65.3,71.65 65.3,70.83 C27.1 | v62.44,76.79 C28.1 | C31.1 69.37,76.79 v69.3,76.79 68.48,76.79 68.48,71.65 68.41,71.65 | C27.1 64.25,70.76 | v60.98,70.76 61.39,70.76 | v64.86,63.4 64.86,67.97 65.36,67.97 | U2.59 52.49,47.63 52.8,47.94 52.8,49.26 52.09,49.97 51.36,49.97 50.49,50.84 50.49,55.86 50.84,56.21 51,56.66 52.1,56.68 52.09,56.69 52.09,57.93 | 52.09,57.93 v52.09,58.57 | 52.09,57.93 53.6,57.93 53.62,57.96 54.37,57.96 54.91,57.42 54.91,57.4 54.96,57.4 55.07,57.41 55.09,57.39 55.1,57.39 55.18,57.31 55.26,57.24 55.26,57.22 55.27,57.21 55.27,57.1 55.27,56.98 55.26,56.97 55.24,56.5 55.79,56.49 55.91,56.49 56.04,56.48 56.62,56.46 56.72,56.47 56.74,56.46 56.76,56.46 56.83,56.38 56.91,56.32 56.92,56.29 56.93,56.27 56.95,56.14 57.22,56.14 57.5,55.86 57.5,52.63 56.95,52.08 54.86,52.08 54.86,46.12 U2.54 55.11,45.9 55.11,44.95 57.17,42.88 58.6,42.88 U2.44 | VOLTAGE_REGULATOR.5 50.4,88.93 C25.1 | v47.46,83.72 49.69,85.95 52.46,85.95 53.16,86.65 53.16,87.63 52.22,88.57 C25.1 | R16.2 104,87.65 89.4,102.26 84.48,102.26 C7.1 84.32,102.26 80.03,97.97 53.36,97.97 | 53.05,38.76 53.05,36.38 U2.23 | 53.05,38.76 56.85,38.76 57.65,37.96 58.6,37.96 U2.34 | 53.36,97.97 50.35,100.99
  Top 0.152: 50.35,100.99 49.39,101.94 C8.1 | 53.36,97.97 53.36,89.08 52.25,89.08 C25.1 | DEBUGGING_HEADER.7 40.03,100.99 50.35,100.99 | v53.05,43.52 53.05,38.76 | v60.98,70.76 60.98,71.84 58.06,71.84 58.06,68.92 R2.2 61.3,67.94 61.55,67.94 | 61.55,67.94 R3.1 | C27.1 64.25,70.83 63.31,69.95 62.33,69.95 61.45,70.76 v60.98,70.76
  Bottom 0.152: v53.05,43.52 52.09,44.47 v52.09,58.57
  pour Route15: 43.2,44.47 43.14,85.11 93.94,85.11 94,43.2 50.82,43.2 50.82,64.09 73.37,64.09 73.3,72.79 64.03,72.73 63.97,65.05 49.43,65.11 49.55,44.47
AVDD
  Top 0.152: C14.1 51.99,48.6 U2.60
BAT_GND  (via drill 0.6)
  Top 0.457: U$1.P$2 116.39,65.11 113.85,65.11 R8.1 111.46,65.11 C11.2 111.31,64.95 107.85,64.95 | U$4.P$2 21.45,72.1 23.99,72.1 C9.2 24.15,72.1 R14.1 26.53,72.1 28.72,72.1 | U$2.P$2 71.78,116.39 71.78,114.16 R10.1 71.78,111.78 C12.2 71.94,111.62 71.94,109.31 | v60.92,31.2 60.98,31.3 65.43,31.3 C21.2 65.43,31.14 65.43,25.58 C10.2 65.43,25.42 R12.1 65.43,23.04 65.43,20.5 U$3.P$2 65.48,20.49 66.98,19 68.3,19 v68.86,18.44 | v31.52,74.44 31.61,74.32 33.04,74.32 C23.2 32.88,72.1 28.72,72.1 | 73.68,105.91 71.94,104.16 C19.2 | 73.68,105.91 74.32,105.91 v74.32,106 | v106.07,62.44 106.07,62.57 104.16,62.57 C17.2 104.32,64.95 107.85,64.95 | 71.94,109.31 71.94,106.07 73.52,106.07 73.68,105.91 | v28.72,70.76 28.72,72.1 | v70.57,109.37 71.94,109.37 71.94,109.31 | v107.85,66.13 107.85,64.95
  Bottom 0.457: v74.32,106 74.32,105.91 67.17,98.77 67.17,85.59 BATT1.- 66.06,84.74 NET_BRIDGE.P$2
  pour Route2: 30.5,49.87 30.5,106.7 106.7,106.7 106.7,30.5 52.09,30.5 52.09,40.66 96.54,40.66 96.42,87.46 40.54,87.46 40.66,49.87
  pour Route2: 64.16,127.66 73.05,127.66 73.05,106.7 64.16,106.7
  pour Route2: 64.16,9.55 73.05,9.55 73.05,30.5 64.16,30.5
  pour Route2: 127.66,73.05 127.66,64.16 106.7,64.16 106.7,73.05
  pour Route2: 11.45,73.05 30.5,73.05 30.5,64.16 11.45,64.16
DTR
  Top 0.152: C13.1 105.12,90.58 JP2.DTR
DVDD
  Top 0.152: U2.22 U2.21 51.86,36.09 51.86,35.35 51.72,35.21 C15.1
FILTERED1
  Top 0.457: C9.1 R13.2 | R14.2 24.31,70.19 C9.1 | U$4.P$1 21.45,70.19 23.99,70.19 C9.1
FILTERED2
  Top 0.457: R10.2 66.54,114.01 66.38,113.85 R9.2 | C12.1 69.87,111.78 69.87,113.85 R10.2 | U$2.P$1 69.87,116.39 69.87,114.16 R10.2
FILTERED3
  Top 0.457: R12.2 67.33,25.42 C10.1 | R11.2 67.49,23.52 R12.2 | U$3.P$1 67.49,20.5 67.49,23.04 R12.2
FILTERED4
  Top 0.457: R8.2 113.69,68.92 R7.2 | C11.1 111.46,67.02 113.53,67.02 R8.2 | U$1.P$1 116.39,67.17 113.85,67.17 R8.2
FLYBACK1
  Top 0.457: 18.12,70.35 18.12,71.14 U$4.P$3 | 18.12,70.35 D4.A | 18.12,70.35 13.99,70.35 U$10.V-
FLYBACK2
  Top 0.457: 70.03,119.72 70.83,119.72 U$2.P$3 | 70.03,119.72 69.24,119.72 66.38,116.86 D2.A | 70.03,119.72 70.03,124.8 U$9.V-
FLYBACK3
  Top 0.457: 67.02,17.17 66.38,17.17 U$3.P$3 | 67.02,17.17 70.83,17.17 D3.A | 67.02,17.17 67.02,12.72 U$12.V-
FLYBACK4
  Top 0.457: 119.72,66.38 116.55,69.56 D1.A | 119.72,66.38 119.72,66.06 U$1.P$3 | U$11.V- 124.48,67.17 123.85,66.54 119.88,66.54 119.72,66.38
GND  (via drill 0.6)
  Top 0.152: U$5.P$18 70.06,70.45 70.06,71.65 | 70.06,71.65 71.4,71.65 | 71.4,71.65 71.84,71.65 71.84,69.24 | 71.84,69.24 70.7,69.24 U$5.P$17 | 71.84,69.24 71.84,68.79 | 71.84,68.79 71.84,68.41 | 71.84,68.41 71.84,67.97 70.7,67.97 U$5.P$14 | 71.84,68.41 70.7,68.41 U$5.P$15 | 71.84,68.79 70.7,68.79 U$5.P$16 | 70.06,71.65 69.68,71.65 | 69.68,71.65 69.25,71.65 | 69.24,71.65 69.25,71.65 | 69.25,71.65 U$5.P$20 | 69.68,71.65 U$5.P$19 | C28.2 65.94,74.95 v65.94,74.89 | v65.94,74.89 67.58,74.89 C31.2 | v65.94,74.89 65.8,74.89 65.8,73.87 | 65.8,73.87 C29.2 | 71.4,71.65 C30.2 v71.4,74.83 | 65.8,73.87 64.67,73.87 64.67,72.61 C27.2 62.76,70.76 v62.76,72.86 | C16.2 51.31,56.28 53.01,56.33 52.97,57.03 v54,57.05 54.96,57.1 54.93,56.21 55.9,56.18 56.63,56.16 C18.2 | 51.46,36.26 U2.20 | U2.20 51.36,36.09 51.36,34.62 50.95,34.21 50.95,33.55 C15.2 50.19,33.52 51.14,32.57 53.36,32.57 53.36,33.68 | 58.53,43.27 U2.45 58.76,43.36 71.3,43.36 71.78,42.88 106.89,42.88 | 106.89,42.88 106.89,30.38 106.83,30.31 96.54,30.31 JP3.GND 94.16,35.42 90.19,35.42 | 106.89,42.88 106.89,46.06 J4.6 | JP2.GND 103.4,106.83 84.54,106.83 R4.2 84.54,105.41 83.88,104.74 83.88,103.57 C7.2 82.57,102.42 82.41,102.57 50.35,102.57 49.87,103.05 48.18,103.05 | R15.2 47.77,104.9 48.18,104.49 48.18,103.05 | 48.18,103.05 48.18,102.67 C8.2 47.49,102.1 46.7,102.89 DEBUGGING_HEADER.10 | VOLTAGE_REGULATOR.2 49.55,92.32 49.55,92.57 49.79,92.81 | C24.1 50,93.02 49.79,92.81 | C26.2 50.19,87.14 C25.2 | 49.79,92.81 49.9,92.7 50.43,92.7 50.56,92.57 50.56,91.18 49.55,90.17 49.55,87.28 C26.2 | C26.2 48.29,85.24 44.6,85.24 44.73,85.11 v44.73,83.78 | v44.03,45.23 44.73,45.23
  Top 0.152: 44.73,45.23 v44.73,42.88 | 59.71,37.65 59.55,37.49 58.76,37.49 U2.33 | 59.71,37.65 59.71,38.28 58.76,38.28 U2.35 | 59.71,37.65 61.93,35.42 90.19,35.42 | 53.36,33.68 53.36,36.22 U2.24 | 52.89,44.95 52.89,45.9 U2.58 | 51.77,44.95 52.89,44.95 | 51.77,44.95 51.62,45.11 51.62,45.9 U2.61 51.49,47.35 C14.2 50.19,48.6 46.85,45.27 44.79,45.27 44.73,45.23 | 52.89,44.95 54.47,44.95 54.47,45.9 U2.55 | 48.92,40.34 48.92,39.87 U2.11 | 49.71,41.77 48.92,41.77 U2.7 | 49.71,41.77 50.03,41.46 50.03,40.34 48.92,40.34 | 48.92,40.34 U2.10 | 51.77,44.95 51.77,41.77 51.62,41.77 | 49.71,41.77 51.62,41.77 | 51.62,41.77 51.62,36.38 U2.20 | v41.36,43.52 40.98,43.52 40.98,41.93 B2.5 | 40.98,36.69 42.57,36.69 42.88,36.38 v42.95,36.28 | 40.98,36.69 39.39,36.69 39.08,36.38 C5.2 | 40.98,36.69 C6.1 | 48.12,103.05 48.18,103.05 | 90.19,35.42 90.19,31.77 77.17,31.77 75.27,33.68 53.36,33.68
  Route2 0.152: 65.55,66.89 64.03,66.89 63.86,67.06 63.86,67.33 62.76,68.43 v62.76,72.86
  Bottom 0.152: NET_BRIDGE.P$1 65.9,79.56 65.9,74.95 v65.94,74.89 | DEBUGGING_HEADER.10 33.2,101.78 33.2,89.72 34.15,88.76 44.63,88.76 44.63,83.84 v44.73,83.78
  other vias: 37.87,43.52 39.58,43.52 43.08,42.89 46.31,42.82 46.38,39.77 44.66,39.84 42.95,39.71 42.95,38 41.62,35.07 39.84,34.63 38,34.57 37.87,45.36 39.84,45.36 41.68,45.3
  pour Route2: 43.2,44.47 43.14,85.11 93.94,85.11 94,43.2 50.82,43.2 50.89,64.09 73.37,64.09 73.3,72.79 64.09,72.73 63.97,65.05 49.43,65.11 49.55,44.47
  pour Route2: 65.55,71.4 71.65,71.4 71.65,65.81 65.55,65.81
  pour Route2: 36.85,49.17 42.44,49.17 42.44,43.84 47.01,43.84 47.01,30.5 36.85,30.5
MISO  (via drill 0.38)
  Top 0.152: v97.65,40.34 58.76,40.34 U2.39
  Bottom 0.152: v97.65,40.34 100.04,42.73 100.04,49.55 J4.1
MOSI  (via drill 0.38)
  Top 0.152: v57.01,39.87 58.6,39.87 U2.38
  Bottom 0.152: v57.01,39.87 96.7,39.87 96.7,48.44 100.67,52.41 102.89,52.41 102.89,49.87 J4.4
N$1
  Top 0.152: FRONT_LED_1.P$2 82.63,104.35 R4.1
N$2
  Top 0.152: C30.1 68.82,72.79 | 68.79,72.79 68.82,72.79 | 68.82,72.79 U$5.P$21
N$3
  Top 0.152: SW1.2 -19.98,-10.46 -19.98,-1.41 SW1.1
N$4
  cutout Route15: 65.55,71.4 71.65,71.4 71.65,65.81 65.55,65.81
N$5
  Top 0.152: FRONT_LED_2.P$2 R15.1
N$6
  Top 0.152: SW1.4 -15.38,-10.46 -15.38,-1.41 SW1.3
N$7
  Top 0.152: C6.2 40.85,38.57 B2.2
N$8
  pour Top: 36.85,49.17 36.85,30.5 47.01,30.5 47.01,43.84 42.44,43.84 42.44,49.17
N$10
  Top 0.152: C29.1 67.53,72.79 U$5.P$24
N$12
  Top 0.152: C16.1 53.69,55.2 53.58,55.1 53.58,52.41 53.49,52.32 53.49,50.82 | 53.49,50.82 U2.57 | 53.49,50.82 53.42,50.75 Y2.1
N$14
  Top 0.152: C18.1 53.99,55.2 53.99,54 | 53.99,54 U2.56 | 53.99,54 56.1,54 Y2.3
N$18
  Top 0.152: C26.1 VOLTAGE_REGULATOR.4
PB5  (via drill 0.38)
  Top 0.152: 34.15,70.51 29.33,69.49 26.22,67.33 R13.1 | 34.15,70.51 34.63,70.98 34.63,78.92 33.36,78.92 32.88,79.4 32.88,92.73 DEBUGGING_HEADER.6 | v54,41.46 58.6,41.46 U2.41 | 34.15,70.51 v49.55,55.11
  Bottom 0.152: v54,41.46 49.55,41.46 v49.55,55.11
PE3  (via drill 0.38)
  Top 0.152: v69.24,28.09 69.71,27.52 70.83,25.58 R11.1 | v58.44,45.9 58.28,46.06 57.49,46.06 U2.49
  Bottom 0.152: v69.24,28.09 56.06,39.55 56.06,43.52 57.49,44.95 | v58.44,45.9 57.49,44.95 | DEBUGGING_HEADER.4 57.49,64.47 57.49,44.95
PE4
  Top 0.152: 64.32,54.16 57.01,46.85 57.01,46.06 U2.50 | 64.32,54.16 78.29,68.13 111.15,68.13 111.94,68.92 R7.1 | DEBUGGING_HEADER.3 54.79,64.63 54.79,60.51 57.97,60.51 64.32,54.16
PE5  (via drill 0.38)
  Top 0.152: v67.65,108.7 R9.1 | DEBUGGING_HEADER.5 33.2,90.19 33.2,84.64 33.84,84 34.47,84 34.95,83.52 35.42,83.52 35.42,79.4 57.81,57.01 57.81,50.5 57.17,49.87 56.54,49.87 56.54,46.06 U2.51
  Bottom 0.152: v67.65,108.7 48.76,90.19 DEBUGGING_HEADER.5
RESET  (via drill 0.38)
  Top 0.152: C13.2 R16.1 105.91,87.49 v105.91,74.95 | v74.95,32.73 64.47,32.73 64,32.25 47.81,32.25 47.81,39.08 47.97,39.23 48.76,39.23 U2.12
  Bottom 0.152: v74.95,32.73 80.67,38.44 101.62,38.44 J4.5 101.62,47.33 104.64,47.33 105.43,48.12 105.43,51.62 104.64,52.41 104.64,73.68 v105.91,74.95
RFANT
  Top 0.457: U$8.FEED 38.73,40.24 38.95,40.24 | 38.95,40.24 B2.1 | C5.1 38.95,40.24
RFN
  Top 0.152: U2.9 42.95,40.92 B2.3
RFP
  Top 0.152: U2.8 42.95,41.36 B2.4
RX0  (via drill 0.38)
  Top 0.152: v72.1,43.84 58.76,43.84 U2.46
  Bottom 0.152: v72.1,43.84 103.53,75.27 103.53,95.91 JP2.TXO
RX1
  Top 0.152: JP3.RXI 85.11,34.31 55.9,34.31 55.11,35.11 55.11,36.22 U2.27
SCK  (via drill 0.38)
  Top 0.152: v98.61,39.39 58.76,39.39 U2.37
  Bottom 0.152: v98.61,39.39 100.35,41.14 100.35,47.33 J4.3
SCL  (via drill 0.38, 0.6)
  Top 0.152: v54.32,34.63 54,34.63 U2.25 | v36.85,83.84 41.93,83.84 54.63,71.14 v54.76,70.83 | U$5.P$2 63.21,69.25 R2.1 62.64,68.92 61.72,69.84 60.13,69.84 v59.14,70.83
  Bottom 0.152: v54.32,34.63 48.16,41.42 48.22,66.32 DEBUGGING_HEADER.1 33.04,81.3 33.04,83.84 v36.85,83.84 | v59.14,70.83 v54.76,70.83
SDA  (via drill 0.38)
  Top 0.152: v54.47,37.81 54.47,36.38 U2.26 | U$5.P$4 64.41,68.39 64.41,66.89 63.46,66.89 R3.2 62.89,66.95 61.97,66.03 60.32,66.03 v55.74,61.46
  Bottom 0.152: v54.47,37.81 55.74,39.08 55.74,61.14 | 55.74,61.14 DEBUGGING_HEADER.2 | 55.74,61.14 v55.74,61.46
TX0  (via drill 0.38)
  Top 0.152: v96.7,67.17 94.16,67.17 71.46,44.47 58.76,44.47 U2.47
  Bottom 0.152: v96.7,67.17 103.84,74.32 103.84,93.68 JP2.RXI
TX1
  Top 0.152: JP3.TXO 86.86,35.11 55.58,35.11 55.58,36.22 U2.28
V
  Top 0.457: BATT1.+ POWER_SWITCH.2
VBAT  (via drill 0.6)
  Top 0.457: POWER_SWITCH.1 74.32,90.07 74.32,90 | VOLTAGE_REGULATOR.1 49.76,91.58 49.76,91.12 49.54,90.89 48.68,90.89 48.55,91.02 48.54,91.02 48.16,91.4 VOLTAGE_REGULATOR.3 48.21,91.93 C24.2 48.12,94 33.84,94 33.04,94.8 33.04,97.81 DEBUGGING_HEADER.8 | U$12.V+ 71.62,12.72 71.62,17.8 71.3,18.12 70.83,18.12 D3.C 70.98,20.5 70.98,22.56 71.46,22.56 71.94,23.04 71.94,24.6 | U$10.V+ 13.99,67.17 16.06,67.17 18.12,65.11 D4.C 18.28,65.27 27.9,65.27 | U$11.V+ 124.48,70.19 120.51,70.19 119.88,69.56 D1.C 119.72,69.71 118.45,70.98 108.1,70.98 | U$9.V+ 66.38,124.8 D2.C 66.22,120.04 66.22,117.81 65.9,117.81 64.47,116.39 64.47,109.62 | FRONT_LED_2.P$1 45.74,105.43 v45.62,105.43 | FRONT_LED_1.P$1 86.38,105.75 v86.76,105.75 | v31.33,63.33 31.45,63.36 33.04,63.36 C23.1 32.88,65.27 27.9,65.27 | 63.68,105.91 65.43,104.16 C19.1 | 63.68,105.91 63.21,105.91 v63.14,106 | v74.57,30.95 74.48,30.98 72.1,30.98 71.94,31.14 C21.1 71.94,30.82 71.94,24.6 | v105.69,73.43 105.59,73.37 104.16,73.37 C17.1 104.32,70.98 108.1,70.98 | 64.47,109.62 64.47,106.07 63.84,106.07 63.68,105.91 | 71.94,24.6 71.55,24.6 71.54,24.58 69.31,24.58 v69.05,24.85 | v27.9,66.57 27.9,65.27 | v65.81,109.69 64.47,109.69 64.47,109.62 | 108.1,70.98 v108.1,69.75
  other vias: 74.51,90.07
  pour Route15: 30.5,49.87 30.5,106.7 106.7,106.7 106.7,30.5 52.09,30.5 52.09,40.66 96.54,40.66 96.42,87.53 40.54,87.53 40.66,49.87
  pour Route15: 64.16,127.66 73.05,127.66 73.05,106.7 64.16,106.7
  pour Route15: 11.45,73.05 30.5,73.05 30.5,64.16 11.45,64.16
  pour Route15: 64.16,9.55 64.16,30.5 73.05,30.5 73.05,9.55
  pour Route15: 106.7,73.05 127.66,73.05 127.66,64.16 106.7,64.16

## Text on the board
tPlace: GND | BAT_GND | VBAT | 3.0V | PB5 | PE5 | PE3 | PE4 | SDA | SCL
bPlace: GND | BAT_GND | VBAT | 3.0V | PB5 | PE5 | PE3 | PE4 | SDA | SCL